# Altium PCB LKAS-EPS_PCB_V2I4.PcbDoc (part 2 of 2)
Units mil, origin at the board's own origin, x right, y up, seen from the top; angles counter-clockwise.
Board outline 1945 x 1335 mil, 4 copper layers (Top Layer, Layer 1, Layer 2, Bottom Layer), stack 23.712 mil thick; 51 components, 66 nets, 233 pads, 107 vias.
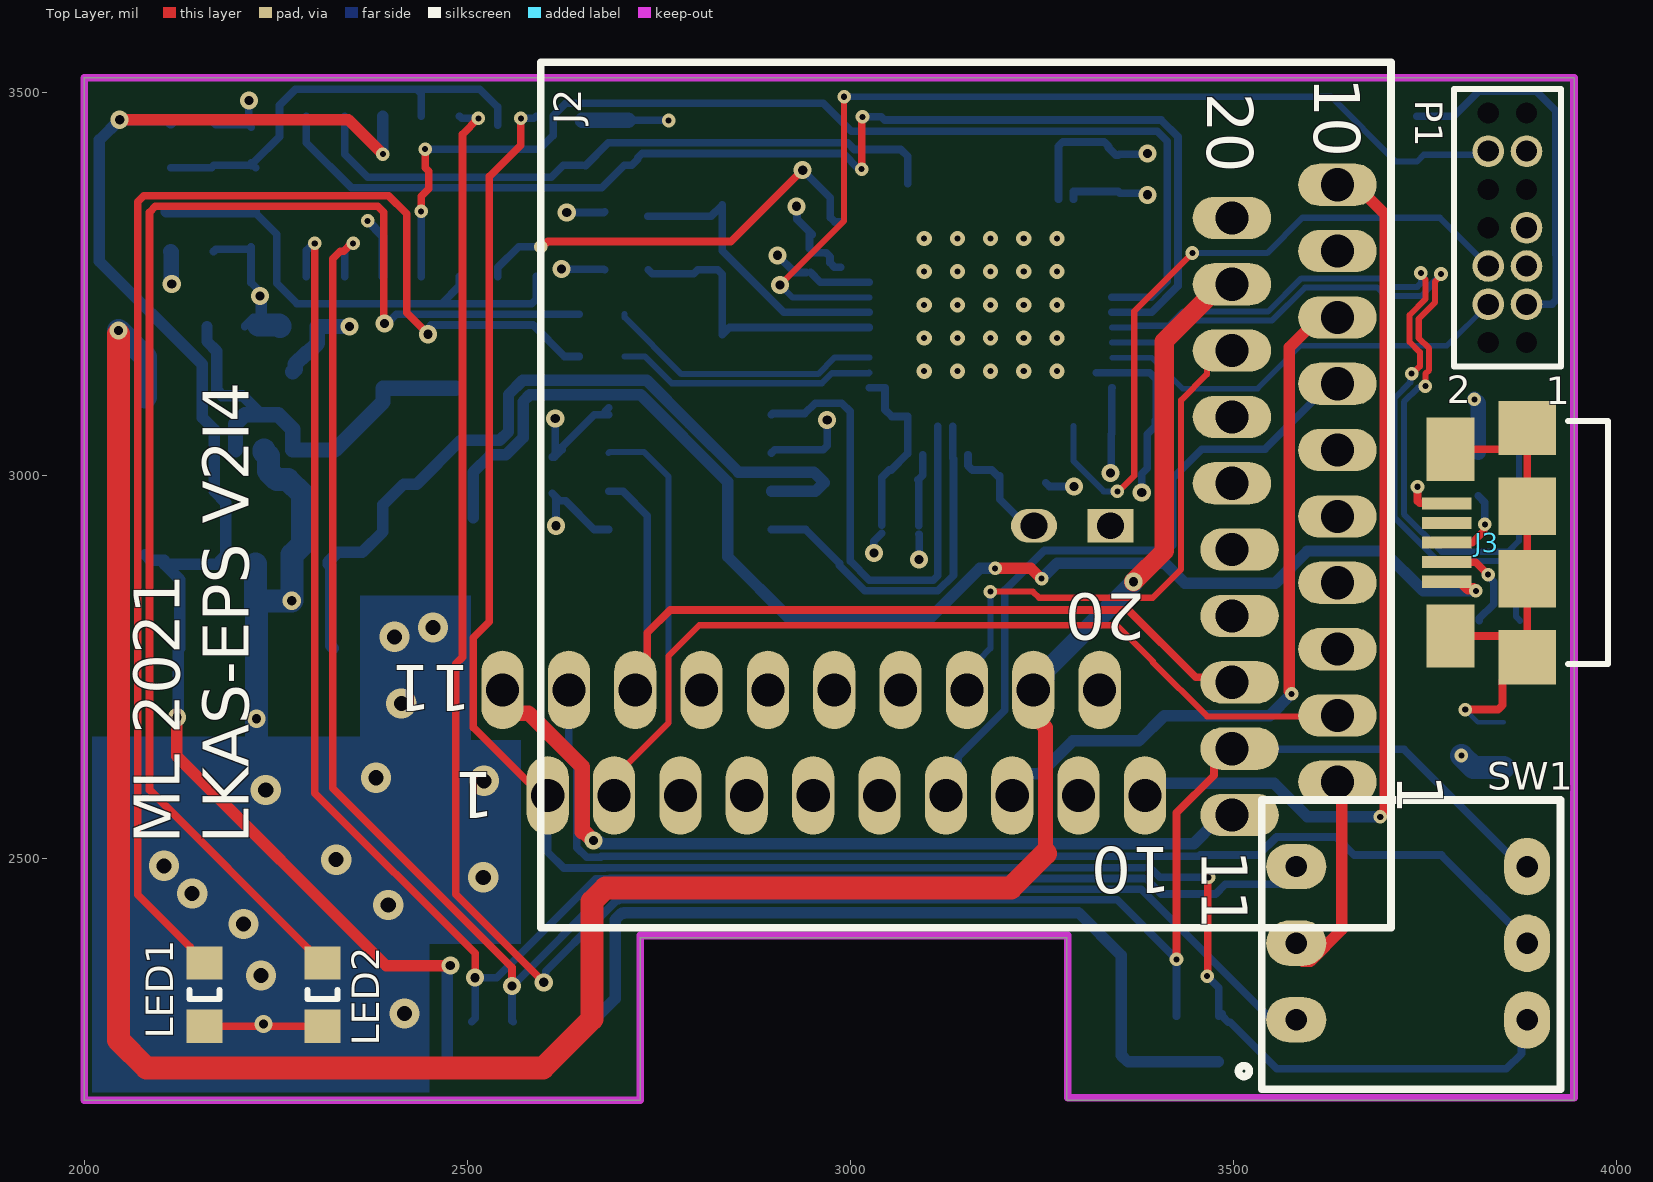
[diagram p0: Top Layer view]

## Via types
v1: diameter 23.62, hole 12, Top Layer to Bottom Layer, tented both sides, 34 vias
v2: diameter 17.72, hole 7.87, Top Layer to Bottom Layer, tented both sides, 33 vias
v3: diameter 19.68, hole 7.87, Top Layer to Bottom Layer, 25 vias
v4: diameter 39.37, hole 19.68, Top Layer to Bottom Layer, tented both sides, 14 vias
v5: diameter 17.72, hole 7.87, Top Layer to Bottom Layer, 1 vias

## Nets (pads, with @x,y where several pads share a name; then routed paths per layer and width w, separated by ;. In a path a pad name is that pad's centre, name@x,y a point inside that pad or via, vN(x,y) a via of type N, cw(c..) or ccw(c..) an arc to the next point about the centre after c; other vN are vias at no path point) (continued)
PB14: U5/6.27
PB15: U5/6.28
PC15: U5/6.4
SHIELD: J3.6 J3.7 J3.8 J3.9 J3.10 J3.11 R13.1 | length 707.8
  Top Layer w10: J3.6 3856.44,2790.95 J3.8 ; J3.7 3856.44,3035.05 J3.9 J3.11 J3.10 J3.8 ; v2(3803,2695) 3845.74,2695 3851.6,2700.86 3851.6,2732.96 3882.03,2763.39 J3.8
  Bottom Layer w6: v2(3803,2695) 3819.47,2678.53 R13.1
STATUS: R9.1 U5/6.2 | length 339.5
  Bottom Layer w8: R9.1 2732,3156 2767,3121 2963,3121 2976.12,3134.12 3024.24,3134.12 U5/6.2@3024.84,3134.72
SWCLK: P1.6 U5/6.37 | length 903.1
  Top Layer w8: v2(3348.84,2979.9) 3350.62,2979.9 3370.88,3000.15 3370.88,3215.02 v2(3446.86,3291)
  Bottom Layer w8: U5/6.37@3291.57,3064.84 3291.57,3019.43 3331.1,2979.9 v2(3348.84,2979.9) ; v2(3446.86,3291) 3544.31,3291 3590.31,3337 3770,3337 P1.6
SWDIO: P1.4 U5/6.34 | length 553.5
  Bottom Layer w7: U5/6.34@3341.77,3154.41 3393.59,3154.41 3434,3114 3532,3114 3588,3170 3779,3170 P1.4
UART2_RX: R4.1 U4.2 U5/6.13 | length 854.4
  Bottom Layer w10: U4.2 2340,3420 2370,3390 2609.8,3390 2625.27,3405.47 R4.1 ; R4.1@2654.46,3405 2684.46,3435 2996.59,3435 3005.44,3426.14 3066.18,3426.14 3075.04,3417.28 U5/6.13@3075.04,3381.77
UART2_TX: U4.9 U5/6.12 | length 555.4
  Top Layer w10: v2(2596.14,3299.25) 2598.23,3299.25 2604.98,3306 2844,3306 2937.19,3399.19 v1(2938,3399.19)
  Bottom Layer w10: U4.9 2540,3272.09 2567.28,3299.37 2596.02,3299.37 v2(2596.14,3299.25) ; v1(2938,3399.19) 2957.82,3379.37 2973.96,3363.23 2973.96,3337.43 2979.81,3331.57 2987.72,3331.57
UART3_RX: R7.1 U4.1 U5/6.31 | length 1599.3
  Top Layer w10: v2(3015,3400.47) 3015,3467.77 v2(3016.09,3468.86)
  Bottom Layer w10: U4.1 2290,3435 2349,3376 2675.61,3376 2705.09,3405.47 2714.93,3405.47 2722.72,3413.27 2722.72,3415.14 2728.58,3421 2990.79,3421 3011.31,3400.47 v2(3015,3400.47) ; v2(3016.09,3468.86) 3040.71,3468.86 3044.95,3464.62 3406.13,3464.62 3428,3442.75 3428,3248 3393.46,3213.46 U5/6.31@3341.77,3213.46
UART3_TX: U4.11 U5/6.30 | length 1465.1
  Top Layer w10: v2(2440,3345.31) 2440,3365 2450,3375 2450,3397.81 2445.24,3402.57 v2(2445.24,3426.67)
  Bottom Layer w10: U4.11 v2(2440,3345.31) ; v2(2445.24,3426.67) 2594.32,3426.67 2612.18,3444.53 2612.18,3469.94 2628.56,3486.32 2964.89,3486.32 3001.21,3450 3400.95,3450 3414,3436.95 3414,3254 3393.15,3233.15 U5/6.30@3341.77,3233.15
USB_N: R14.1 U5/6.32 | length 1059.8
  Top Layer w8: v2(3733,3133.63) 3734.17,3133.63 3743.72,3143.17 3743.72,3161.53 3730.2,3175.04 3730.2,3210.07 3751.29,3231.16 3751.29,3256.12 3745.14,3262.27 v2(3745.14,3264.9)
  Bottom Layer w8: U5/6.32@3341.77,3193.78 3367.86,3193.78 3370.08,3196 3415.75,3196 3434.42,3214.68 3545.71,3214.68 3589.01,3257.98 3692.94,3257.98 3704.12,3246.8 3740.37,3246.8 3745.06,3251.49 3745.06,3264.82 v2(3745.14,3264.9) ; v2(3733,3133.63) 3731.14,3131.77 3731.14,3122.05 3710.82,3101.73 3710.82,2945.21 3767.03,2889 3864.31,2889 3869,2884.31 3869,2816.57 R14.1
USB_P: R15.1 R16.1 U5/6.33 | length 1119.1
  Top Layer w8: v2(3750.86,3117.21) 3750.86,3133.34 3755.72,3138.2 3755.72,3166.5 3742.2,3180.01 3742.2,3205.1 3763.29,3226.19 3763.29,3253.56 3771.36,3261.63 v2(3771.36,3263.61)
  Bottom Layer w8: U5/6.33@3341.77,3174.09 3406.09,3174.09 3416,3184 3420.72,3184 3439.39,3202.68 3550.68,3202.68 3593.98,3245.98 3687.97,3245.98 3699.15,3234.8 3745.34,3234.8 3757.26,3246.72 3757.26,3249.51 v2(3771.36,3263.61) ; v2(3750.86,3117.21) 3749,3115.35 3741.42,3115.35 3722.82,3096.76 3722.82,2950.18 3772,2901 3859,2901 3873.15,2915.15 R15.1 R16.1
USB_R_N: J3.2 R14.2 | length 131.6
  Top Layer w10: J3.2 3816.47,2887.41 v2(3832.74,2871.14)
  Bottom Layer w10: R14.2 3821.43,2813.95 3840,2832.53 3840,2861.79 3832.74,2869.05 v2(3832.74,2871.14)
USB_R_P: J3.3 R15.2 | length 105
  Top Layer w10: J3.3 3812.26,2913 3827.18,2927.93 3827.18,2935.38 v2(3828.66,2936.86)
  Bottom Layer w10: R15.2 3828.66,2965.34 v2(3828.66,2936.86)
V_USB: D1.1 J3.1 | length 1750.4
  Top Layer w15: v2(3189.26,2879.26) 3236,2879.26 3249.26,2866 v2(3250,2866) ; J3.1 3779.06,2861.44 3797.76,2861.44 3806.76,2852.44 3813.68,2852.44 3816.13,2850 v2(3816.86,2850)
  Bottom Layer w15: D1.1 2508,3005.02 2530.41,3027.43 2550.54,3027.43 2572.95,3049.85 2572.95,3097.03 2581.74,3105.81 2726.47,3105.81 2840,2992.29 2840,2894.79 2921.79,2813 3103,2813 3169.26,2879.26 v2(3189.26,2879.26) ; v2(3250,2866) 3270.14,2886.14 3410.86,2886.14 3437,2860 3555,2860 3597,2902 3696,2902 3748,2850 v2(3816.86,2850)
pads on no net: J1.3 J1.4 J1.5 J1.6 J1.9 J1.15 J1.16 J1.17 J1.20 J2.3 J2.4 J2.5 J2.6 J2.9 J2.15 J2.16 J2.17 J2.20 J3.4 P1.1 P1.2 P1.8 P1.9 P1.10 P1.13 P1.14 U3.4

## Polygon pours and split planes (outlines as drawn)
GND on Layer 1 (split plane): 3924.9,3499.9 3924.9,2205.1 3303.1,2205.1 3303.1,2397 3302.71,2400.92 3301.57,2404.69 3299.71,2408.17 3297.21,2411.21 3294.16,2413.71 3290.69,2415.57 3286.92,2416.71 3283,2417.1 2726,2417.1 2722.08,2416.71 2718.31,2415.57 2714.83,2413.71 2711.79,2411.21 2709.29,2408.17 2707.43,2404.69 2706.29,2400.92 2705.9,2397 2705.9,2205.1 2020.1,2205.1 2020.1,3499.9
+3V3 on Layer 2 (split plane): 3924.9,3499.9 3924.9,2205.1 3303.1,2205.1 3303.1,2397 3302.71,2400.92 3301.57,2404.69 3299.71,2408.17 3297.21,2411.21 3294.16,2413.71 3290.69,2415.57 3286.92,2416.71 3283,2417.1 2726,2417.1 2722.08,2416.71 2718.31,2415.57 2714.83,2413.71 2711.79,2411.21 2709.29,2408.17 2707.43,2404.69 2706.29,2400.92 2705.9,2397 2705.9,2205.1 2020.1,2205.1 2020.1,3499.9

## Keep-outs
Keep-Out Layer:
  lines w10: 2000,2185 2726,2185 2726,2400 3284,2400 3284,2188 3945,2188 3945,3520 2000,3520 2000,2185

## Other copper
Bottom Layer:
  rectangle net GND: 2353,2389 2570,2655
  rectangle net GND: 2360,2461 2505,2844
  region net GND: 2451,2195 2451,2660 2010,2660 2010,2195

## Silkscreen, mask and mechanical layers (free items; w line width, h text height)
Top Overlay:
  text "ML 2021  / LKAS-EPS V2I4" at 2215,2520 h60 r90

## Dimensions
3945,2188 to 3945,3520 on Top Component Center
2000,2170 to 3945,2170 on Top Component Center
2605.24,2582.87 to 2000,3520 on Top Component Center
2605.24,2582.87 to 2000,2170 on Top Component Center

## Text inside footprints (layer, text, board x,y; h text height)
J1: Top Overlay "10" at 3419,2515 h60 r180; Top Overlay "20" at 3385,2846 h60 r180; Top Overlay "11" at 2505.24,2752.87 h60 r180; Top Overlay "1" at 2535.24,2612.87 h60 r180
J2: Top Overlay "10" at 3606.14,3520.16 h60 r270; Top Overlay "20" at 3466.14,3500.16 h60 r270; Top Overlay "11" at 3459,2511.84 h60 r270; Top Overlay "1" at 3714,2610.84 h60 r270
J3: Mechanical 1 "PCB Edge" at 3914,2393 h39.37 r90
P1: Top Overlay "1" at 3908.31,3093.31 h36; Top Overlay "2" at 3779,3095 h36